# Altium PCB dc_power_backup_module_v1.PcbDoc (part 3 of 4)
Units mil, origin at the board's own origin, x right, y up, seen from the top; angles counter-clockwise.
Board outline 3300 x 2890 mil, 2 copper layers (Top Layer, Bottom Layer); 44 components, 21 nets, 171 pads, 32 vias.
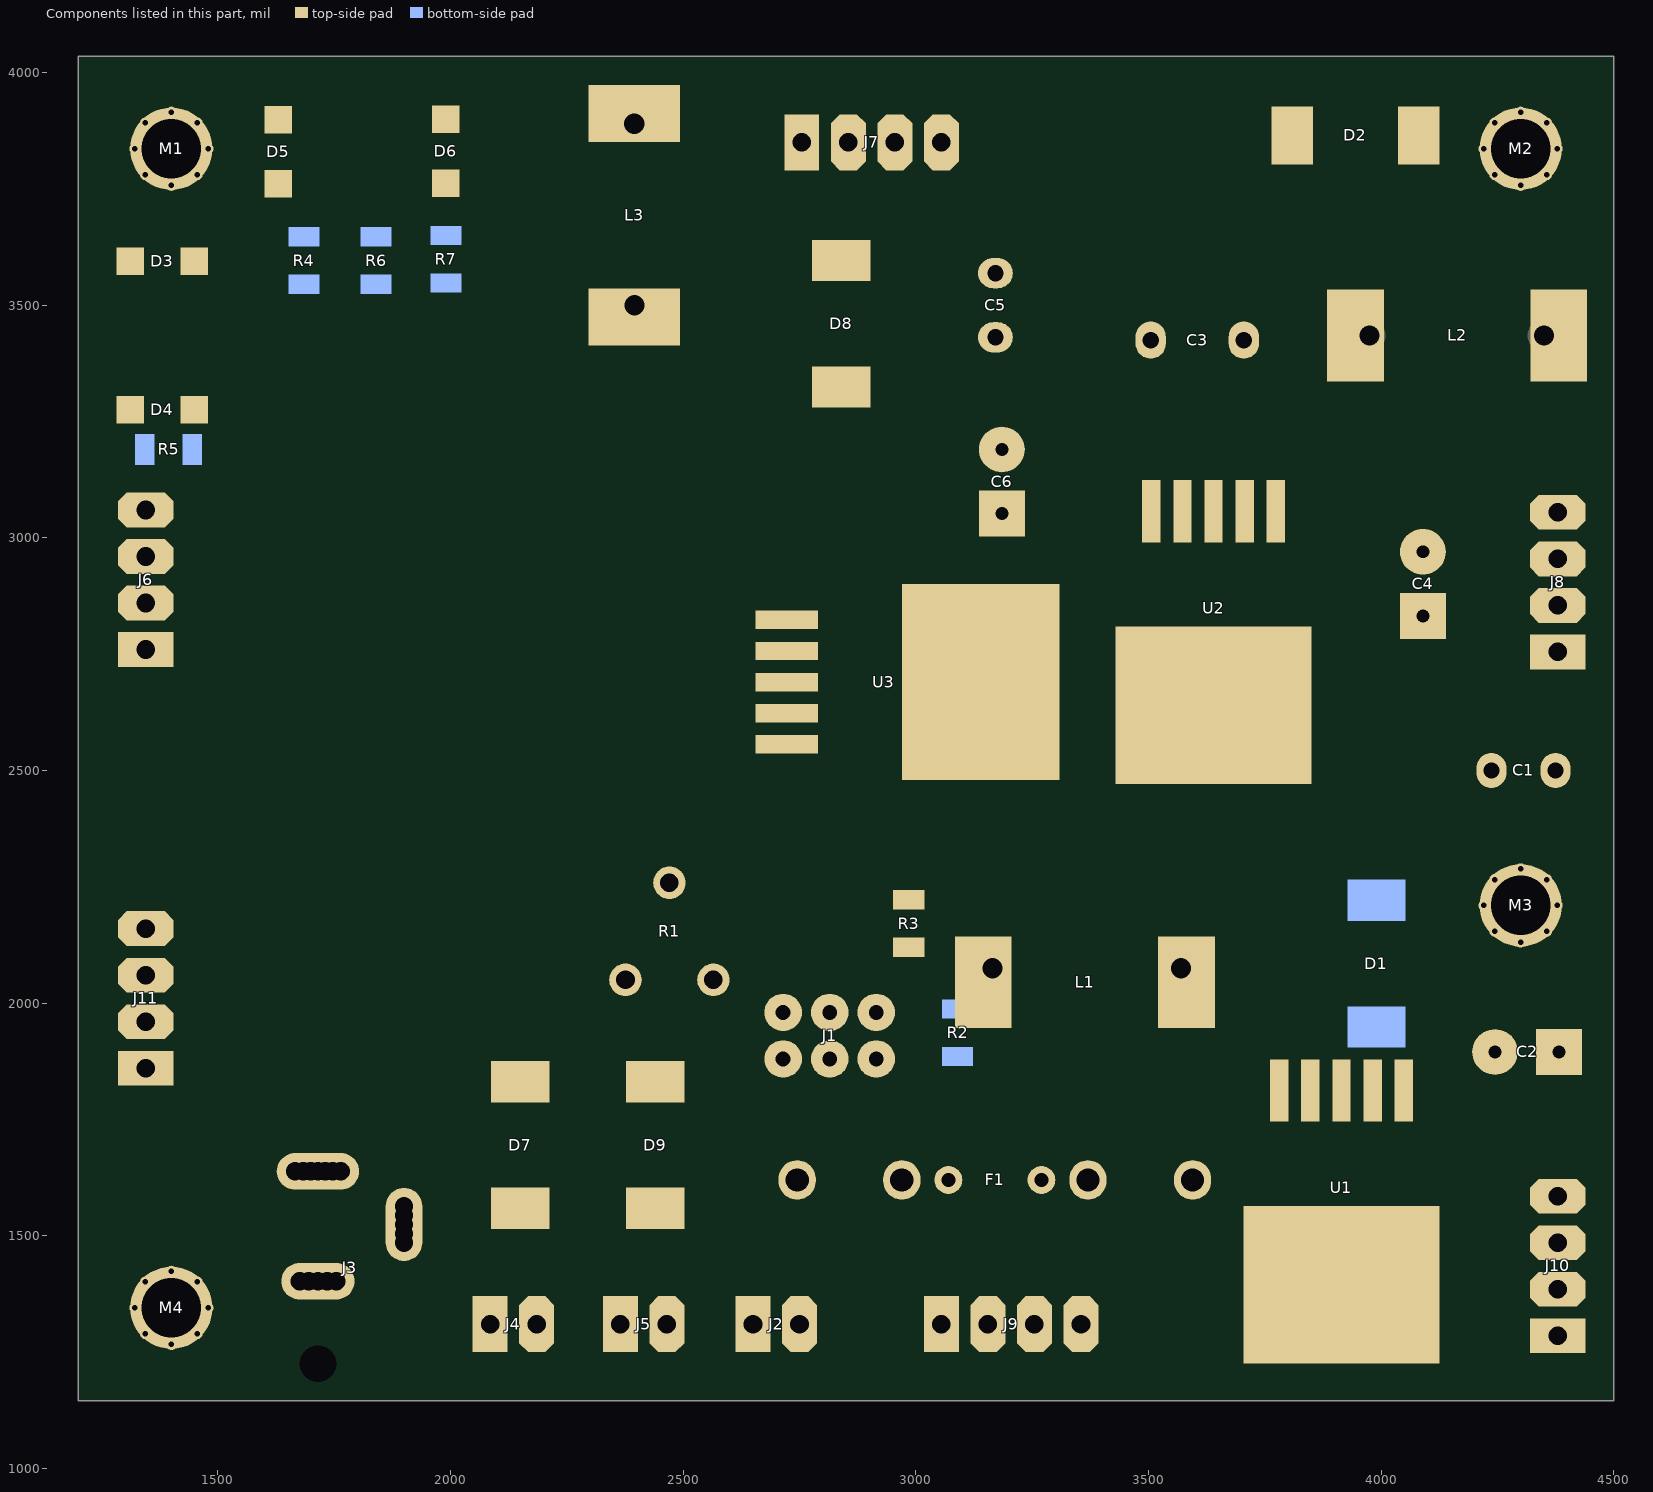
[diagram p3: the components of this part, seen from the top]

## Via types
v1: diameter 50, hole 28, Top Layer to Bottom Layer, 32 vias

## Nets (pads, with @x,y where several pads share a name; then routed paths per layer and width w, separated by ;. In a path a pad name is that pad's centre, name@x,y a point inside that pad or via, vN(x,y) a via of type N, cw(c..) or ccw(c..) an arc to the next point about the centre after c; other vN are vias at no path point) (continued)
copper on no net: (continued)
  Top Layer w0.3: 2058.5,2349.8 2062.1,2349.8 ; 2058.5,2357.6 2062.1,2357.6 ; 2058.5,2370.5 2062.4,2370.5 ; 2058.5,2378.3 2062.1,2378.3 ; 2058.5,2599.1 2063.3,2599.1 ; 2058.8,2339.3 2061.8,2339.3 ; 2058.8,2347.4 2061.8,2347.4 ; 2058.8,2360 2061.8,2360 ; 2058.8,2368.1 2061.8,2368.1 ; 2058.8,2491.4 2106.8,2491.4 ; 2058.8,2599.4 2063.6,2599.4 ; 2058.8,2599.7 2063.6,2599.7 ; 2059.1,2337.2 2061.5,2337.2 ; 2059.1,2370.2 2061.5,2370.2 ; 2059.1,2462.6 2131.7,2462.6 ; 2059.1,2600 2063.9,2600 ; 2059.4,2349.5 2061.2,2349.5 ; 2059.4,2357.9 2061.2,2357.9 ; 2059.4,2378.6 2061.2,2378.6 ; 2059.4,2600.3 2064.2,2600.3 ; 2059.7,2600.6 2064.5,2600.6 ; 2060,2320.7 2064.2,2320.7 ; 2060,2491.7 2107.4,2491.7 ; 2060,2600.9 2064.8,2600.9 ; 2060,2601.2 2065.1,2601.2 ; 2060.3,2601.5 2065.4,2601.5 ; 2060.6,2601.8 2065.7,2601.8 ; 2060.9,2602.1 2066,2602.1 ; 2061.2,2320.4 2064.2,2320.4 ; 2061.2,2492 2108.3,2492 ; 2061.2,2602.4 2066.3,2602.4 ; 2061.2,2602.7 2066.6,2602.7 ; 2061.5,2309 2063,2309 ; 2061.5,2320.1 2064.2,2320.1 ; 2061.5,2603 2066.9,2603 ; 2061.8,2603.3 2067.2,2603.3 ; 2062.1,2309.3 2063.3,2309.3 ; 2062.1,2319.8 2064.2,2319.8 ; 2062.1,2492.3 2108.9,2492.3 ; 2062.1,2603.6 2067.5,2603.6 ; 2062.4,2309.6 2063.6,2309.6 ; 2062.4,2319.5 2064.2,2319.5 ; 2062.4,2462.9 2133.2,2462.9 ; 2062.4,2603.9 2067.8,2603.9 ; 2062.7,2309.9 2063.9,2309.9 ; 2062.7,2318.9 2064.2,2318.9 ; 2062.7,2319.2 2064.2,2319.2 ; 2062.7,2604.2 2068.1,2604.2 ; 2062.7,2604.5 2068.4,2604.5 ; 2063,2310.2 2064.2,2310.2 ; 2063,2318.6 2064.2,2318.6 ; 2063,2321 2064.2,2321 ; 2063,2604.8 2068.7,2604.8 ; 2063.3,2310.5 2064.5,2310.5 ; 2063.3,2318 2064.2,2318 ; 2063.3,2318.3 2064.2,2318.3 ; 2063.3,2321.3 2064.2,2321.3 ; 2063.3,2321.6 2063.9,2321.6 ; 2063.3,2492.6 2109.5,2492.6 ; 2063.3,2605.1 2069,2605.1 ; 2063.6,2310.8 2064.5,2310.8 ; 2063.6,2317.1 2064.2,2317.1 ; 2063.6,2317.4 2064.2,2317.4 ; 2063.6,2317.7 2064.2,2317.7 ; 2063.6,2605.4 2069.3,2605.4 ; 2063.9,2311.1 2064.5,2311.1 ; 2063.9,2311.4 2064.2,2311.4 ; 2063.9,2605.7 2069.6,2605.7 ; 2064.2,2492.9 2110.1,2492.9 ; 2064.2,2606 2069.9,2606 ; 2064.5,2606.3 2070.2,2606.3 ; 2064.5,2606.6 2070.5,2606.6 ; 2064.8,2606.9 2070.8,2606.9 ; 2065.1,2493.2 2110.7,2493.2 ; 2065.1,2607.2 2071.1,2607.2 ; 2065.4,2463.2 2134.7,2463.2 ; 2065.4,2607.5 2071.4,2607.5 ; 2065.7,2607.8 2071.7,2607.8 ; 2066,2608.1 2072.3,2608.1 ; 2066.3,2352.8 2074.7,2352.8 ; 2066.3,2353.1 2075,2353.1 ; 2066.3,2353.4 2075,2353.4 ; 2066.3,2353.7 2075,2353.7 ; 2066.3,2354 2075,2354 ; 2066.3,2354.3 2075,2354.3 ; 2066.3,2354.6 2074.7,2354.6 ; 2066.3,2373.5 2074.7,2373.5 ; 2066.3,2373.8 2075,2373.8 ; 2066.3,2374.1 2075,2374.1 ; 2066.3,2374.4 2075,2374.4 ; 2066.3,2374.7 2075,2374.7 ; 2066.3,2375 2075,2375 ; 2066.3,2375.3 2074.7,2375.3 ; 2066.3,2493.5 2111.3,2493.5 ; 2066.3,2608.4 2072.6,2608.4 ; 2066.6,2351.9 2074.7,2351.9 ; 2066.6,2352.2 2074.7,2352.2 ; 2066.6,2352.5 2074.7,2352.5 ; 2066.6,2354.9 2074.7,2354.9 ; 2066.6,2355.2 2074.7,2355.2 ; 2066.6,2355.5 2074.7,2355.5 ; 2066.6,2372.6 2074.7,2372.6 ; 2066.6,2372.9 2074.7,2372.9 ; 2066.6,2373.2 2074.7,2373.2 ; 2066.6,2375.6 2074.7,2375.6 ; 2066.6,2375.9 2074.7,2375.9 ; 2066.6,2376.2 2074.7,2376.2 ; 2066.6,2608.7 2072.9,2608.7 ; 2066.9,2351.3 2074.1,2351.3 ; 2066.9,2351.6 2074.4,2351.6 ; 2066.9,2355.8 2074.4,2355.8 ; 2066.9,2356.1 2074.1,2356.1 ; 2066.9,2372 2074.4,2372 ; 2066.9,2372.3 2074.4,2372.3 ; 2066.9,2376.5 2074.4,2376.5 ; 2066.9,2376.8 2074.1,2376.8 ; 2066.9,2609 2073.2,2609 ; 2066.9,2609.3 2073.5,2609.3 ; 2067.2,2351 2074.1,2351 ; 2067.2,2356.4 2074.1,2356.4 ; 2067.2,2371.7 2074.1,2371.7 ; 2067.2,2377.1 2074.1,2377.1 ; 2067.2,2493.8 2111.9,2493.8 ; 2067.2,2609.6 2073.8,2609.6 ; 2067.5,2350.7 2073.8,2350.7 ; 2067.5,2356.7 2073.8,2356.7 ; 2067.5,2371.4 2073.8,2371.4 ; 2067.5,2377.4 2073.8,2377.4 ; 2067.5,2609.9 2074.1,2609.9 ; 2067.8,2350.4 2073.5,2350.4 ; 2067.8,2357 2073.5,2357 ; 2067.8,2371.1 2073.5,2371.1 ; 2067.8,2377.7 2073.5,2377.7 ; 2067.8,2610.2 2074.7,2610.2 ; 2068.1,2350.1 2073.2,2350.1 ; 2068.1,2357.3 2073.2,2357.3 ; 2068.1,2370.8 2073.2,2370.8 ; 2068.1,2378 2072.9,2378 ; 2068.1,2463.5 2135.9,2463.5 ; 2068.1,2494.1 2112.5,2494.1 ; 2068.1,2610.5 2075,2610.5 ; 2068.4,2610.8 2075.3,2610.8 ; 2068.7,2349.8 2072.6,2349.8 ; 2068.7,2357.6 2072.6,2357.6 ; 2068.7,2370.5 2072.6,2370.5 ; 2068.7,2378.3 2072.6,2378.3 ; 2068.7,2611.1 2075.6,2611.1 ; 2069,2494.4 2113.1,2494.4 ; 2069,2611.4 2075.9,2611.4 ; 2069.3,2611.7 2076.5,2611.7 ; 2069.6,2349.5 2071.7,2349.5 ; 2069.6,2357.9 2071.7,2357.9 ; 2069.6,2370.2 2071.7,2370.2 ; 2069.6,2378.6 2071.4,2378.6 ; 2069.6,2612 2076.8,2612 ; 2069.9,2494.7 2113.4,2494.7 ; 2069.9,2612.3 2077.1,2612.3 ; 2070.2,2612.6 2077.4,2612.6 ; 2070.5,2463.8 2137.4,2463.8 ; 2070.5,2612.9 2078,2612.9 ; 2070.8,2495 2114,2495 ; 2070.8,2613.2 2078.3,2613.2 ; 2071.1,2613.5 2078.6,2613.5 ; 2071.4,2613.8 2078.9,2613.8 ; 2071.7,2495.3 2114.6,2495.3 ; 2071.7,2614.1 2079.5,2614.1 ; 2072,2614.4 2079.8,2614.4 ; 2072.3,2614.7 2080.1,2614.7 ; 2072.6,2495.6 2115.2,2495.6 ; 2072.6,2615 2080.7,2615 ; 2072.9,2464.1 2138.6,2464.1 ; 2072.9,2615.3 2081,2615.3 ; 2073.2,2615.6 2081.3,2615.6 ; 2073.5,2495.9 2115.5,2495.9 ; 2073.5,2615.9 2081.9,2615.9 ; 2073.8,2318.3 2074.4,2318.3 ; 2073.8,2318.6 2074.4,2318.6 ; 2073.8,2318.9 2074.4,2318.9 ; 2073.8,2319.2 2074.7,2319.2 ; 2073.8,2319.5 2074.7,2319.5 ; 2073.8,2319.8 2075,2319.8 ; 2073.8,2320.1 2075.6,2320.1 ; 2073.8,2320.4 2084.9,2320.4 ; 2073.8,2320.7 2084.9,2320.7 ; 2073.8,2321 2084.9,2321 ; 2073.8,2321.3 2084.9,2321.3 ; 2073.8,2616.2 2082.2,2616.2 ; 2074.1,2496.2 2116.1,2496.2 ; 2074.1,2616.5 2082.5,2616.5 ; 2074.4,2616.8 2083.1,2616.8 ; 2074.7,2617.1 2083.4,2617.1 ; 2075,2496.5 2116.7,2496.5 ; 2075,2617.4 2084,2617.4 ; 2075.3,2464.4 2139.8,2464.4 ; 2075.3,2617.7 2084.3,2617.7 ; 2075.6,2618 2084.9,2618 ; 2075.9,2496.8 2117,2496.8 ; 2076.2,2618.3 2085.2,2618.3 ; 2076.5,2353.4 2085.2,2353.4 ; 2076.5,2353.7 2085.2,2353.7 ; 2076.5,2354 2085.2,2354 ; 2076.5,2373.8 2085.2,2373.8 ; 2076.5,2374.1 2085.2,2374.1 ; 2076.5,2374.4 2085.2,2374.4 ; 2076.5,2374.7 2085.2,2374.7 ; 2076.5,2497.1 2117.6,2497.1 ; 2076.5,2618.6 2085.5,2618.6 ; 2076.8,2352.2 2084.9,2352.2 ; 2076.8,2352.5 2084.9,2352.5 ; 2076.8,2352.8 2085.2,2352.8 ; 2076.8,2353.1 2085.2,2353.1 ; 2076.8,2354.3 2085.2,2354.3 ; 2076.8,2354.6 2085.2,2354.6 ; 2076.8,2354.9 2084.9,2354.9 ; 2076.8,2355.2 2084.9,2355.2 ; 2076.8,2372.9 2084.9,2372.9 ; 2076.8,2373.2 2084.9,2373.2 ; 2076.8,2373.5 2085.2,2373.5 ; 2076.8,2375 2085.2,2375 ; 2076.8,2375.3 2085.2,2375.3 ; 2076.8,2375.6 2084.9,2375.6 ; 2076.8,2375.9 2084.9,2375.9 ; 2076.8,2618.9 2086.1,2618.9 ; 2077.1,2351.6 2084.6,2351.6 ; 2077.1,2351.9 2084.9,2351.9 ; 2077.1,2355.5 2084.9,2355.5 ; 2077.1,2355.8 2084.6,2355.8 ; 2077.1,2372.3 2084.6,2372.3 ; 2077.1,2372.6 2084.9,2372.6 ; 2077.1,2376.2 2084.9,2376.2 ; 2077.1,2376.5 2084.6,2376.5 ; 2077.1,2619.2 2086.4,2619.2 ; 2077.4,2351 2084.3,2351 ; 2077.4,2351.3 2084.6,2351.3 ; 2077.4,2356.1 2084.6,2356.1 ; 2077.4,2356.4 2084.3,2356.4 ; 2077.4,2371.7 2084.3,2371.7 ; 2077.4,2372 2084.6,2372 ; 2077.4,2376.8 2084.6,2376.8 ; 2077.4,2377.1 2084.3,2377.1 ; 2077.4,2464.7 2141,2464.7 ; 2077.4,2497.4 2118.2,2497.4 ; 2077.4,2619.5 2087,2619.5 ; 2077.7,2350.7 2084,2350.7 ; 2077.7,2356.7 2084,2356.7 ; 2077.7,2371.4 2084,2371.4 ; 2077.7,2377.4 2084,2377.4 ; 2077.7,2619.8 2087.3,2619.8 ; 2078,2309 2080.4,2309 ; 2078,2309.3 2080.4,2309.3 ; 2078,2309.6 2080.4,2309.6 ; 2078,2350.4 2083.7,2350.4 ; 2078,2357 2083.7,2357 ; 2078,2371.1 2083.7,2371.1 ; 2078,2377.7 2083.7,2377.7 ; 2078,2497.7 2118.5,2497.7 ; 2078,2620.1 2087.9,2620.1 ; 2078.3,2309.9 2080.4,2309.9 ; 2078.3,2310.2 2080.4,2310.2 ; 2078.3,2310.5 2080.4,2310.5 ; 2078.3,2310.8 2080.4,2310.8 ; 2078.3,2311.1 2080.4,2311.1 ; 2078.3,2311.4 2080.4,2311.4 ; 2078.3,2311.7 2080.4,2311.7 ; 2078.3,2312 2080.4,2312 ; 2078.3,2312.3 2080.4,2312.3 ; 2078.3,2312.6 2080.4,2312.6 ; 2078.3,2312.9 2080.4,2312.9 ; 2078.3,2313.2 2080.4,2313.2 ; 2078.3,2313.5 2080.4,2313.5 ; 2078.3,2313.8 2080.4,2313.8 ; 2078.3,2314.1 2080.4,2314.1 ; 2078.3,2314.4 2080.4,2314.4 ; 2078.3,2314.7 2080.4,2314.7 ; 2078.3,2315 2080.4,2315 ; 2078.3,2315.3 2080.4,2315.3 ; 2078.3,2315.6 2080.4,2315.6 ; 2078.3,2315.9 2080.4,2315.9 ; 2078.3,2316.2 2080.4,2316.2 ; 2078.3,2316.5 2080.4,2316.5 ; 2078.3,2316.8 2080.4,2316.8 ; 2078.3,2317.1 2080.4,2317.1 ; 2078.3,2317.4 2080.4,2317.4 ; 2078.3,2317.7 2080.4,2317.7 ; 2078.3,2318 2080.4,2318 ; 2078.3,2318.3 2080.4,2318.3 ; 2078.3,2318.6 2080.4,2318.6 ; 2078.3,2318.9 2080.4,2318.9 ; 2078.3,2319.2 2080.4,2319.2 ; 2078.3,2319.5 2080.4,2319.5 ; 2078.3,2319.8 2080.4,2319.8 ; 2078.3,2320.1 2080.4,2320.1 ; 2078.3,2370.8 2083.4,2370.8 ; 2078.3,2620.4 2088.5,2620.4 ; 2078.6,2350.1 2083.4,2350.1 ; 2078.6,2357.3 2083.4,2357.3 ; 2078.6,2378 2083.4,2378 ; 2078.9,2349.8 2082.8,2349.8 ; 2078.9,2357.6 2082.8,2357.6 ; 2078.9,2370.5 2082.8,2370.5 ; 2078.9,2378.3 2082.8,2378.3 ; 2078.9,2498 2119.1,2498 ; 2078.9,2620.7 2088.8,2620.7 ; 2079.2,2465 2142.2,2465 ; 2079.2,2621 2089.4,2621 ; 2079.5,2498.3 2119.4,2498.3 ; 2079.5,2537.3 2084.6,2537.3 ; 2079.5,2621.3 2089.7,2621.3 ; 2079.8,2349.5 2081.9,2349.5 ; 2079.8,2357.9 2081.9,2357.9 ; 2079.8,2370.2 2081.9,2370.2 ; 2079.8,2537 2087.6,2537 ; 2079.8,2621.6 2090.3,2621.6 ; 2080.1,2378.6 2081.9,2378.6 ; 2080.1,2498.6 2119.7,2498.6 ; 2080.1,2621.9 2090.9,2621.9 ; 2080.4,2536.7 2089.7,2536.7 ; 2080.4,2622.2 2091.2,2622.2 ; 2081,2498.9 2120.3,2498.9 ; 2081,2536.4 2091.5,2536.4 ; 2081,2622.5 2091.8,2622.5 ; 2081.3,2465.3 2143.4,2465.3 ; 2081.3,2622.8 2092.4,2622.8 ; 2081.6,2499.2 2120.6,2499.2 ; 2081.6,2623.1 2092.7,2623.1 ; 2081.9,2536.1 2093.3,2536.1 ; 2081.9,2623.4 2093.3,2623.4 ; 2082.2,2499.5 2120.9,2499.5 ; 2082.5,2535.8 2094.8,2535.8 ; 2082.5,2623.7 2093.9,2623.7 ; 2082.8,2499.8 2121.5,2499.8 ; 2082.8,2624 2094.5,2624 ; 2083.1,2320.1 2084.9,2320.1 ; 2083.1,2465.6 2144.6,2465.6 ; 2083.1,2535.5 2096.3,2535.5 ; 2083.1,2624.3 2094.8,2624.3 ; 2083.4,2319.8 2084.9,2319.8 ; 2083.4,2500.1 2121.8,2500.1 ; 2083.4,2624.6 2095.4,2624.6 ; 2083.7,2319.5 2084.9,2319.5 ; 2084,2318.9 2084.9,2318.9 ; 2084,2319.2 2084.9,2319.2 ; 2084,2500.4 2122.1,2500.4 ; 2084,2535.2 2097.5,2535.2 ; 2084,2624.9 2096,2624.9 ; 2084.3,2318.3 2084.9,2318.3 ; 2084.3,2318.6 2084.9,2318.6 ; 2084.3,2625.2 2096.6,2625.2 ; 2084.6,2500.7 2122.7,2500.7 ; 2084.6,2534.9 2099,2534.9 ; 2084.6,2625.5 2097.2,2625.5 ; 2084.9,2465.9 2145.8,2465.9 ; 2085.2,2501 2123,2501 ; 2085.2,2534.6 2100.2,2534.6 ; 2085.2,2625.8 2097.8,2625.8 ; 2085.5,2626.1 2098.4,2626.1 ; 2085.8,2501.3 2123.3,2501.3 ; 2085.8,2534.3 2101.1,2534.3 ; 2085.8,2626.4 2099,2626.4 ; 2086.1,2626.7 2099.6,2626.7 ; 2086.4,2501.6 2123.6,2501.6 ; 2086.4,2534 2102.3,2534 ; 2086.7,2466.2 2147,2466.2 ; 2086.7,2627 2100.2,2627 ; 2087,2349.5 2108.6,2349.5 ; 2087,2349.8 2108.3,2349.8 ; 2087,2350.1 2108,2350.1 ; 2087,2350.4 2107.7,2350.4 ; 2087,2350.7 2107.4,2350.7 ; 2087,2351 2107.1,2351 ; 2087,2351.3 2106.8,2351.3 ; 2087,2351.6 2106.2,2351.6 ; 2087,2351.9 2105.9,2351.9 ; 2087,2352.2 2105.6,2352.2 ; 2087,2352.5 2105,2352.5 ; 2087,2352.8 2105.3,2352.8 ; 2087,2353.1 2105.9,2353.1 ; 2087,2353.4 2106.8,2353.4 ; 2087,2353.7 2107.4,2353.7 ; 2087,2354 2108,2354 ; 2087,2354.3 2108.6,2354.3 ; 2087,2354.6 2108.9,2354.6 ; 2087,2354.9 2109.5,2354.9 ; 2087,2355.2 2110.1,2355.2 ; 2087,2355.5 2110.4,2355.5 ; 2087,2355.8 2110.7,2355.8 ; 2087,2356.1 2111.3,2356.1 ; 2087,2356.4 2111.6,2356.4 ; 2087,2356.7 2111.9,2356.7 ; 2087,2357 2112.5,2357 ; 2087,2357.3 2112.8,2357.3 ; 2087,2357.6 2113.1,2357.6 ; 2087,2357.9 2113.4,2357.9 ; 2087,2370.2 2113.1,2370.2 ; 2087,2370.5 2112.8,2370.5 ; 2087,2370.8 2112.5,2370.8 ; 2087,2371.1 2112.2,2371.1 ; 2087,2371.4 2111.9,2371.4 ; 2087,2371.7 2111.6,2371.7 ; 2087,2372 2111,2372 ; 2087,2372.3 2110.7,2372.3 ; 2087,2372.6 2110.4,2372.6 ; 2087,2372.9 2109.8,2372.9 ; 2087,2373.2 2109.2,2373.2 ; 2087,2373.5 2108.9,2373.5 ; 2087,2373.8 2108.3,2373.8 ; 2087,2374.1 2107.7,2374.1 ; 2087,2374.4 2107.1,2374.4 ; 2087,2374.7 2106.5,2374.7 ; 2087,2375 2105.9,2375 ; 2087,2375.3 2105,2375.3 ; 2087,2375.6 2104.4,2375.6 ; 2087,2375.9 2103.5,2375.9 ; 2087,2376.2 2102.6,2376.2 ; 2087,2376.5 2101.7,2376.5 ; 2087,2376.8 2100.5,2376.8 ; 2087,2377.1 2099.3,2377.1 ; 2087,2377.4 2098.1,2377.4 ; 2087,2377.7 2096.6,2377.7 ; 2087,2378 2094.8,2378 ; 2087,2378.3 2092.7,2378.3 ; 2087,2378.6 2088.8,2378.6 ; 2087,2501.9 2123.9,2501.9 ; 2087,2627.3 2100.8,2627.3 ; 2087.3,2533.7 2103.5,2533.7 ; 2087.6,2502.2 2124.2,2502.2 ; 2087.6,2627.6 2101.4,2627.6 ; 2087.9,2533.4 2104.4,2533.4 ; 2087.9,2627.9 2102,2627.9 ; 2088.2,2466.5 2147.9,2466.5 ; 2088.2,2502.5 2124.5,2502.5 ; 2088.2,2628.2 2102.6,2628.2 ; 2088.5,2502.8 2124.8,2502.8 ; 2088.5,2533.1 2105.6,2533.1 ; 2088.8,2628.5 2103.2,2628.5 ; 2089.1,2503.1 2125.1,2503.1 ; 2089.1,2532.8 2106.5,2532.8 ; 2089.1,2628.8 2103.8,2628.8 ; 2089.4,2349.2 2108.9,2349.2 ; 2089.7,2503.4 2125.4,2503.4 ; 2089.7,2532.5 2107.4,2532.5 ; 2089.7,2629.1 2104.7,2629.1 ; 2090,2466.8 2149.1,2466.8 ; 2090,2503.7 2125.7,2503.7 ; 2090,2629.4 2105.3,2629.4 ; 2090.3,2532.2 2108.3,2532.2 ; 2090.3,2629.7 2105.9,2629.7 ; 2090.6,2504 2126,2504 ; 2090.9,2531.9 2109.2,2531.9 ; 2090.9,2630 2106.5,2630 ; 2091.2,2369.9 2113.4,2369.9 ; 2091.2,2504.3 2126.3,2504.3 ; 2091.2,2630.3 2107.4,2630.3 ; 2091.5,2348.9 2109.2,2348.9 ; 2091.5,2358.2 2113.7,2358.2 ; 2091.5,2467.1 2150,2467.1 ; 2091.5,2504.6 2126.6,2504.6 ; 2091.5,2531.6 2110.1,2531.6 ; 2091.8,2630.6 2108,2630.6 ; 2092.1,2504.9 2126.9,2504.9 ; 2092.1,2531.3 2111,2531.3 ; 2092.1,2630.9 2108.9,2630.9 ; 2092.4,2505.2 2127.2,2505.2 ; 2092.7,2348.6 2109.5,2348.6 ; 2092.7,2531 2111.9,2531 ; 2092.7,2631.2 2109.5,2631.2 ; 2093,2467.4 2150.9,2467.4 ; 2093,2505.5 2127.5,2505.5 ; 2093.3,2505.8 2127.8,2505.8 ; 2093.3,2530.7 2112.5,2530.7 ; 2093.3,2631.5 2110.4,2631.5 ; 2093.6,2321 2102,2321 ; 2093.6,2321.3 2100.8,2321.3 ; 2093.6,2631.8 2111,2631.8 ; 2093.9,2348.3 2109.8,2348.3 ; 2093.9,2506.1 2127.8,2506.1 ; 2093.9,2530.4 2113.4,2530.4 ; 2094.2,2369.6 2113.7,2369.6 ; 2094.2,2506.4 2128.1,2506.4 ; 2094.2,2530.1 2114,2530.1 ; 2094.2,2632.1 2111.9,2632.1 ; 2094.5,2320.7 2102.6,2320.7 ; 2094.5,2467.7 2152.1,2467.7 ; 2094.5,2506.7 2128.4,2506.7 ; 2094.5,2632.4 2112.5,2632.4 ; 2094.8,2348 2110.1,2348 ; 2094.8,2358.5 2113.7,2358.5 ; 2094.8,2529.8 2114.9,2529.8 ; 2095.1,2309 2097.8,2309 ; 2095.1,2320.4 2102.9,2320.4 ; 2095.1,2507 2128.7,2507 ; 2095.1,2632.7 2113.4,2632.7 ; 2095.4,2309.3 2097.8,2309.3 ; 2095.4,2309.6 2097.5,2309.6 ; 2095.4,2309.9 2097.5,2309.9 ; 2095.4,2310.2 2097.5,2310.2 ; 2095.4,2310.5 2097.5,2310.5 ; 2095.4,2310.8 2097.5,2310.8 ; 2095.4,2311.1 2097.5,2311.1 ; 2095.4,2311.4 2097.5,2311.4 ; 2095.4,2311.7 2097.5,2311.7 ; 2095.4,2312 2097.5,2312 ; 2095.4,2312.3 2097.5,2312.3 ; 2095.4,2312.6 2097.5,2312.6 ; 2095.4,2312.9 2097.5,2312.9 ; 2095.4,2313.2 2097.5,2313.2 ; 2095.4,2313.5 2097.5,2313.5 ; 2095.4,2313.8 2097.5,2313.8 ; 2095.4,2314.1 2101.1,2314.1 ; 2095.4,2314.4 2101.4,2314.4 ; 2095.4,2314.7 2102,2314.7 ; 2095.4,2315 2097.5,2315 ; 2095.4,2315.3 2097.5,2315.3 ; 2095.4,2315.6 2097.5,2315.6 ; 2095.4,2315.9 2097.5,2315.9 ; 2095.4,2316.2 2097.5,2316.2 ; 2095.4,2316.5 2097.5,2316.5 ; 2095.4,2316.8 2097.5,2316.8 ; 2095.4,2317.1 2097.5,2317.1 ; 2095.4,2317.4 2097.5,2317.4 ; 2095.4,2317.7 2097.5,2317.7 ; 2095.4,2318 2097.5,2318 ; 2095.4,2318.3 2097.5,2318.3 ; 2095.4,2318.6 2097.5,2318.6 ; 2095.4,2318.9 2097.5,2318.9 ; 2095.4,2319.2 2097.5,2319.2 ; 2095.4,2319.5 2097.5,2319.5 ; 2095.4,2319.8 2097.5,2319.8 ; 2095.4,2320.1 2097.5,2320.1 ; 2095.4,2347.7 2110.4,2347.7 ; 2095.4,2507.3 2128.7,2507.3 ; 2095.4,2529.5 2115.5,2529.5 ; 2095.4,2633 2114.3,2633 ; 2095.7,2507.6 2129,2507.6 ; 2095.7,2529.2 2116.4,2529.2 ; 2096,2468 2153,2468 ; 2096,2507.9 2129.3,2507.9 ; 2096,2633.3 2115.2,2633.3 ; 2096.3,2347.4 2110.7,2347.4 ; 2096.3,2369.3 2114,2369.3 ; 2096.3,2528.9 2117,2528.9 ; 2096.6,2508.2 2129.3,2508.2 ; 2096.6,2528.6 2117.6,2528.6 ; 2096.6,2633.6 2116.1,2633.6 ; 2096.9,2347.1 2111,2347.1 ; 2096.9,2358.8 2114,2358.8 ; 2096.9,2508.5 2129.6,2508.5 ; 2096.9,2633.9 2117,2633.9 ; 2097.2,2468.3 2153.9,2468.3 ; 2097.2,2508.8 2129.6,2508.8 ; 2097.2,2528.3 2118.2,2528.3 ; 2097.5,2346.8 2111,2346.8 ; 2097.5,2509.1 2129.9,2509.1 ; 2097.5,2528 2118.8,2528 ; 2097.5,2634.2 2117.9,2634.2 ; 2097.8,2509.4 2129.9,2509.4 ; 2097.8,2527.7 2119.4,2527.7 ; 2098.1,2346.5 2111.3,2346.5 ; 2098.1,2369 2114.3,2369 ; 2098.1,2509.7 2130.2,2509.7 ; 2098.1,2634.5 2118.8,2634.5 ; 2098.4,2359.1 2114.3,2359.1 ; 2098.4,2510 2130.2,2510 ; 2098.4,2527.4 2120,2527.4 ; 2098.7,2313.8 2101.4,2313.8 ; 2098.7,2315 2102.6,2315 ; 2098.7,2346.2 2111.6,2346.2 ; 2098.7,2468.6 2154.8,2468.6 ; 2098.7,2510.3 2130.2,2510.3 ; 2098.7,2527.1 2120.6,2527.1 ; 2098.7,2634.8 2119.7,2634.8 ; 2099,2313.5 2101.7,2313.5 ; 2099,2345.9 2111.9,2345.9 ; 2099,2510.6 2130.5,2510.6 ; 2099,2526.8 2121.2,2526.8 ; 2099,2635.1 2120.9,2635.1 ; 2099.3,2313.2 2101.7,2313.2 ; 2099.3,2368.7 2114.3,2368.7 ; 2099.3,2510.9 2130.5,2510.9 ; 2099.3,2526.5 2121.8,2526.5 ; 2099.6,2312.6 2102.3,2312.6 ; 2099.6,2312.9 2102,2312.9 ; 2099.6,2345.6 2111.9,2345.6 ; 2099.6,2511.2 2130.5,2511.2 ; 2099.6,2526.2 2122.1,2526.2 ; 2099.6,2635.4 2121.8,2635.4 ; 2099.9,2312.3 2102.6,2312.3 ; 2099.9,2315.3 2103.2,2315.3 ; 2099.9,2359.4 2114.6,2359.4 ; 2099.9,2468.9 2155.7,2468.9 ; 2099.9,2511.5 2130.8,2511.5 ; 2099.9,2525.9 2122.7,2525.9 ; 2100.2,2311.7 2102.9,2311.7 ; 2100.2,2312 2102.6,2312 ; 2100.2,2320.1 2103.2,2320.1 ; 2100.2,2345.3 2112.2,2345.3 ; 2100.2,2511.8 2130.8,2511.8 ; 2100.2,2525.6 2123,2525.6 ; 2100.2,2635.7 2123,2635.7 ; 2100.5,2311.4 2103.2,2311.4 ; 2100.5,2315.6 2103.2,2315.6 ; 2100.5,2319.8 2103.5,2319.8 ; 2100.5,2345 2112.5,2345 ; 2100.5,2368.4 2114.6,2368.4 ; 2100.5,2512.1 2130.8,2512.1 ; 2100.5,2525.3 2123.6,2525.3 ; 2100.8,2311.1 2103.2,2311.1 ; 2100.8,2315.9 2103.5,2315.9 ; 2100.8,2344.7 2112.5,2344.7 ; 2100.8,2359.7 2114.6,2359.7 ; 2100.8,2512.4 2130.8,2512.4 ; 2100.8,2525 2123.9,2525 ; 2100.8,2636 2123.9,2636 ; 2101.1,2310.5 2103.8,2310.5 ; 2101.1,2310.8 2103.5,2310.8 ; 2101.1,2316.2 2103.8,2316.2 ; 2101.1,2319.2 2103.8,2319.2 ; 2101.1,2319.5 2103.8,2319.5 ; 2101.1,2512.7 2130.8,2512.7 ; 2101.1,2513 2131.1,2513 ; 2101.1,2524.7 2124.5,2524.7 ; 2101.1,2636.3 2125.1,2636.3 ; 2101.4,2310.2 2104.1,2310.2 ; 2101.4,2316.5 2103.8,2316.5 ; 2101.4,2316.8 2104.1,2316.8 ; 2101.4,2317.1 2104.1,2317.1 ; 2101.4,2318.6 2104.1,2318.6 ; 2101.4,2318.9 2104.1,2318.9 ; 2101.4,2344.4 2112.8,2344.4 ; 2101.4,2469.2 2156.6,2469.2 ; 2101.4,2513.3 2131.1,2513.3 ; 2101.4,2524.4 2124.8,2524.4 ; 2101.7,2309.6 2104.4,2309.6 ; 2101.7,2309.9 2104.1,2309.9 ; 2101.7,2317.4 2104.1,2317.4 ; 2101.7,2317.7 2104.1,2317.7 ; 2101.7,2318 2104.1,2318 ; 2101.7,2318.3 2104.1,2318.3 ; 2101.7,2344.1 2113.1,2344.1 ; 2101.7,2368.1 2114.9,2368.1 ; 2101.7,2513.6 2131.1,2513.6 ; 2101.7,2513.9 2131.1,2513.9 ; 2101.7,2523.8 2125.7,2523.8 ; 2101.7,2524.1 2125.1,2524.1 ; 2101.7,2636.6 2126.3,2636.6 ; 2102,2309.3 2104.7,2309.3 ; 2102,2343.8 2113.1,2343.8 ; 2102,2360 2114.9,2360 ; 2102,2514.2 2131.1,2514.2 ; 2102,2523.5 2126,2523.5 ; 2102.3,2309 2105.3,2309 ; 2102.3,2343.5 2113.4,2343.5 ; 2102.3,2514.5 2131.1,2514.5 ; 2102.3,2514.8 2131.1,2514.8 ; 2102.3,2522.9 2126.6,2522.9 ; 2102.3,2523.2 2126.3,2523.2 ; 2102.3,2636.9 2127.8,2636.9 ; 2102.6,2343.2 2113.4,2343.2 ; 2102.6,2367.8 2114.9,2367.8 ; 2102.6,2469.5 2157.5,2469.5 ; 2102.6,2515.1 2130.8,2515.1 ; 2102.6,2515.4 2130.8,2515.4 ; 2102.6,2522.3 2127.2,2522.3 ; 2102.6,2522.6 2126.9,2522.6 ; 2102.9,2342.9 2113.7,2342.9 ; 2102.9,2360.3 2115.2,2360.3 ; 2102.9,2515.7 2130.8,2515.7 ; 2102.9,2516 2130.8,2516 ; 2102.9,2516.3 2130.8,2516.3 ; 2102.9,2521.7 2127.8,2521.7 ; 2102.9,2522 2127.5,2522 ; 2102.9,2637.2 2129,2637.2 ; 2103.2,2342.6 2113.7,2342.6 ; 2103.2,2367.5 2115.2,2367.5 ; 2103.2,2516.6 2130.5,2516.6 ; 2103.2,2516.9 2130.5,2516.9 ; 2103.2,2517.2 2130.5,2517.2 ; 2103.2,2520.8 2128.4,2520.8 ; 2103.2,2521.1 2128.1,2521.1 ; 2103.2,2521.4 2127.8,2521.4 ; 2103.5,2342.3 2114,2342.3 ; 2103.5,2360.6 2115.2,2360.6 ; 2103.5,2517.5 2130.2,2517.5 ; 2103.5,2517.8 2130.2,2517.8 ; 2103.5,2518.1 2130.2,2518.1 ; 2103.5,2518.4 2129.9,2518.4 ; 2103.5,2518.7 2129.9,2518.7 ; 2103.5,2519 2129.6,2519 ; 2103.5,2519.3 2129.3,2519.3 ; 2103.5,2519.6 2129.3,2519.6 ; 2103.5,2519.9 2129,2519.9 ; 2103.5,2520.2 2128.7,2520.2 ; 2103.5,2520.5 2128.7,2520.5 ; 2103.5,2637.5 2130.5,2637.5 ; 2103.8,2342 2114,2342 ; 2103.8,2469.8 2158.1,2469.8 ; 2104.1,2341.7 2114.3,2341.7 ; 2104.1,2367.2 2115.2,2367.2 ; 2104.1,2637.8 2132,2637.8 ; 2104.4,2341.4 2114.3,2341.4 ; 2104.4,2360.9 2115.2,2360.9 ; 2104.7,2340.8 2114.6,2340.8 ; 2104.7,2341.1 2114.6,2341.1 ; 2104.7,2361.2 2115.5,2361.2 ; 2104.7,2366.9 2115.5,2366.9 ; 2104.7,2638.1 2133.5,2638.1 ; 2105,2340.5 2114.6,2340.5 ; 2105,2470.1 2159,2470.1 ; 2105.3,2339.9 2114.9,2339.9 ; 2105.3,2340.2 2114.9,2340.2 ; 2105.3,2361.5 2115.5,2361.5 ; 2105.3,2366.6 2115.5,2366.6 ; 2105.3,2638.4 2135.3,2638.4 ; 2105.6,2339.3 2115.2,2339.3 ; 2105.6,2339.6 2114.9,2339.6 ; 2105.6,2366.3 2115.5,2366.3 ; 2105.9,2338.7 2115.2,2338.7 ; 2105.9,2339 2115.2,2339 ; 2105.9,2361.8 2115.8,2361.8 ; 2105.9,2638.7 2137.1,2638.7 ; 2106.2,2338.1 2115.5,2338.1 ; 2106.2,2338.4 2115.2,2338.4 ; 2106.2,2362.1 2115.8,2362.1 ; 2106.2,2366 2115.8,2366 ; 2106.2,2470.4 2159.9,2470.4 ; 2106.5,2337.5 2115.5,2337.5 ; 2106.5,2337.8 2115.5,2337.8 ; 2106.5,2362.4 2115.8,2362.4 ; 2106.5,2365.7 2115.8,2365.7 ; 2106.5,2639 2139.2,2639 ; 2106.8,2336.6 2115.8,2336.6 ; 2106.8,2336.9 2115.5,2336.9 ; 2106.8,2337.2 2115.5,2337.2 ; 2106.8,2362.7 2115.8,2362.7 ; 2106.8,2365.4 2115.8,2365.4 ; 2107.1,2335.1 2115.8,2335.1 ; 2107.1,2335.4 2115.8,2335.4 ; 2107.1,2335.7 2115.8,2335.7 ; 2107.1,2336 2115.8,2336 ; 2107.1,2336.3 2115.8,2336.3 ; 2107.1,2363 2115.8,2363 ; 2107.1,2363.3 2115.8,2363.3 ; 2107.1,2364.8 2115.8,2364.8 ; 2107.1,2365.1 2115.8,2365.1 ; 2107.1,2450.3 2132.6,2450.3 ; 2107.1,2639.3 2141.9,2639.3 ; 2107.4,2328.8 2115.8,2328.8 ; 2107.4,2329.1 2115.8,2329.1 ; 2107.4,2329.4 2115.8,2329.4 ; 2107.4,2329.7 2115.8,2329.7 ; 2107.4,2330 2115.8,2330 ; 2107.4,2330.3 2115.8,2330.3 ; 2107.4,2330.6 2115.8,2330.6 ; 2107.4,2330.9 2115.8,2330.9 ; 2107.4,2331.2 2115.8,2331.2 ; 2107.4,2331.5 2115.8,2331.5 ; 2107.4,2331.8 2115.8,2331.8 ; 2107.4,2332.1 2115.8,2332.1 ; 2107.4,2332.4 2115.8,2332.4 ; 2107.4,2332.7 2115.8,2332.7 ; 2107.4,2333 2115.8,2333 ; 2107.4,2333.3 2115.8,2333.3 ; 2107.4,2333.6 2115.8,2333.6 ; 2107.4,2333.9 2115.8,2333.9 ; 2107.4,2334.2 2115.8,2334.2 ; 2107.4,2334.5 2115.8,2334.5 ; 2107.4,2334.8 2115.8,2334.8 ; 2107.4,2363.6 2115.8,2363.6 ; 2107.4,2363.9 2115.8,2363.9 ; 2107.4,2364.2 2115.8,2364.2 ; 2107.4,2364.5 2115.8,2364.5 ; 2107.4,2470.7 2160.5,2470.7 ; 2107.7,2639.6 2145.2,2639.6 ; 2108.3,2639.9 2204.3,2639.9 ; 2108.6,2450.6 2135.3,2450.6 ; 2108.6,2471 2161.4,2471 ; 2108.9,2450 2129.6,2450 ; 2108.9,2640.2 2204,2640.2 ; 2109.8,2471.3 2162,2471.3 ; 2109.8,2640.5 2203.4,2640.5 ; 2110.4,2640.8 2202.8,2640.8 ; 2111,2471.6 2162.9,2471.6 ; 2111,2641.1 2202.2,2641.1 ; 2111.3,2450.9 2137.4,2450.9 ; 2111.6,2641.4 2201.6,2641.4 ; 2112.2,2471.9 2163.5,2471.9 ; 2112.5,2641.7 2201,2641.7 ; 2113.1,2472.2 2164.4,2472.2 ; 2113.1,2642 2200.4,2642 ; 2113.7,2449.7 2125.1,2449.7 ; 2114,2642.3 2199.8,2642.3 ; 2114.3,2451.2 2139.2,2451.2 ; 2114.3,2472.5 2165,2472.5 ; 2114.6,2642.6 2199.2,2642.6 ; 2115.2,2312.9 2117.9,2312.9 ; 2115.2,2313.2 2117.9,2313.2 ; 2115.2,2313.5 2117.6,2313.5 ; 2115.2,2313.8 2117.6,2313.8 ; 2115.2,2314.1 2117.6,2314.1 ; 2115.2,2314.4 2117.6,2314.4 ; 2115.2,2314.7 2117.6,2314.7 ; 2115.2,2315 2117.6,2315 ; 2115.2,2315.3 2117.6,2315.3 ; 2115.2,2315.6 2117.6,2315.6 ; 2115.2,2315.9 2117.6,2315.9 ; 2115.2,2316.2 2117.9,2316.2 ; 2115.2,2316.5 2117.9,2316.5 ; 2115.2,2472.8 2165.6,2472.8 ; 2115.5,2311.7 2118.2,2311.7 ; 2115.5,2312 2117.9,2312 ; 2115.5,2312.3 2117.9,2312.3 ; 2115.5,2312.6 2117.9,2312.6 ; 2115.5,2316.8 2117.9,2316.8 ; 2115.5,2317.1 2117.9,2317.1 ; 2115.5,2317.4 2117.9,2317.4 ; 2115.5,2642.9 2198.3,2642.9 ; 2115.8,2311.1 2118.2,2311.1 ; 2115.8,2311.4 2118.2,2311.4 ; 2115.8,2317.7 2118.2,2317.7 ; 2115.8,2318 2118.2,2318 ; 2116.1,2310.5 2118.5,2310.5 ; 2116.1,2310.8 2118.5,2310.8 ; 2116.1,2318.3 2118.2,2318.3 ; 2116.1,2318.6 2118.5,2318.6 ; 2116.1,2473.1 2166.2,2473.1 ; 2116.1,2643.2 2197.7,2643.2 ; 2116.4,2310.2 2118.8,2310.2 ; 2116.4,2318.9 2118.8,2318.9 ; 2116.7,2309.9 2119.1,2309.9 ; 2116.7,2319.2 2118.8,2319.2 ; 2116.7,2451.5 2141,2451.5 ; 2117,2309.6 2119.1,2309.6 ; 2117,2319.5 2119.1,2319.5 ; 2117,2319.8 2119.4,2319.8 ; 2117,2643.5 2197.1,2643.5 ; 2117.3,2309.3 2119.7,2309.3 ; 2117.3,2320.1 2119.7,2320.1 ; 2117.3,2473.4 2166.8,2473.4 ; 2117.6,2309 2120,2309 ; 2117.9,2320.4 2120.3,2320.4 ; 2117.9,2643.8 2196.2,2643.8 ; 2118.2,2320.7 2121.5,2320.7 ; 2118.2,2473.7 2167.4,2473.7 ; 2118.5,2644.1 2195.6,2644.1 ; 2118.8,2321 2124.8,2321 ; 2119.1,2451.8 2142.8,2451.8 ; 2119.1,2474 2168,2474 ; 2119.4,2321.3 2124.2,2321.3 ; 2119.4,2644.4 2194.7,2644.4 ; 2119.7,2332.1 2128.1,2332.1 ; 2119.7,2332.4 2128.4,2332.4 ; 2119.7,2332.7 2128.4,2332.7 ; 2119.7,2333 2128.4,2333 ; 2119.7,2333.3 2128.4,2333.3 ; 2119.7,2333.6 2128.4,2333.6 ; 2119.7,2333.9 2128.1,2333.9 ; 2119.7,2373.5 2128.1,2373.5 ; 2119.7,2373.8 2128.4,2373.8 ; 2119.7,2374.1 2128.4,2374.1 ; 2119.7,2374.4 2128.4,2374.4 ; 2119.7,2374.7 2128.4,2374.7 ; 2119.7,2375 2128.4,2375 ; 2119.7,2375.3 2128.1,2375.3 ; 2120,2331.2 2127.8,2331.2 ; 2120,2331.5 2128.1,2331.5 ; 2120,2331.8 2128.1,2331.8 ; 2120,2334.2 2128.1,2334.2 ; 2120,2334.5 2128.1,2334.5 ; 2120,2334.8 2128.1,2334.8 ; 2120,2372.6 2128.1,2372.6 ; 2120,2372.9 2128.1,2372.9 ; 2120,2373.2 2128.1,2373.2 ; 2120,2375.6 2128.1,2375.6 ; 2120,2375.9 2128.1,2375.9 ; 2120,2376.2 2128.1,2376.2 ; 2120,2474.3 2168.6,2474.3 ; 2120.3,2321.6 2123.3,2321.6 ; 2120.3,2330.9 2127.8,2330.9 ; 2120.3,2335.1 2127.8,2335.1 ; 2120.3,2335.4 2127.8,2335.4 ; 2120.3,2372 2127.8,2372 ; 2120.3,2372.3 2127.8,2372.3 ; 2120.3,2376.5 2127.8,2376.5 ; 2120.3,2376.8 2127.5,2376.8 ; 2120.3,2644.7 2194.1,2644.7 ; 2120.6,2330.3 2127.2,2330.3 ; 2120.6,2330.6 2127.5,2330.6 ; 2120.6,2335.7 2127.5,2335.7 ; 2120.6,2371.7 2127.5,2371.7 ; 2120.6,2377.1 2127.5,2377.1 ; 2120.9,2330 2127.2,2330 ; 2120.9,2336 2127.2,2336 ; 2120.9,2371.4 2127.2,2371.4 ; 2120.9,2377.4 2127.2,2377.4 ; 2120.9,2474.6 2169.2,2474.6 ; 2121.2,2329.7 2126.6,2329.7 ; 2121.2,2336.3 2126.9,2336.3 ; 2121.2,2371.1 2126.9,2371.1 ; 2121.2,2377.7 2126.9,2377.7 ; 2121.2,2645 2193.2,2645 ; 2121.5,2336.6 2126.6,2336.6 ; 2121.5,2370.8 2126.6,2370.8 ; 2121.5,2378 2126.3,2378 ; 2121.5,2452.1 2144.3,2452.1 ; 2121.8,2329.4 2126.3,2329.4 ; 2121.8,2336.9 2126,2336.9 ; 2121.8,2474.9 2169.8,2474.9 ; 2122.1,2320.7 2125.4,2320.7 ; 2122.1,2370.5 2126,2370.5 ; 2122.1,2378.3 2126,2378.3 ; 2122.1,2645.3 2192.6,2645.3 ; 2122.4,2329.1 2125.7,2329.1 ; 2122.7,2337.2 2125.4,2337.2 ; 2122.7,2475.2 2170.4,2475.2 ; 2123,2370.2 2125.1,2370.2 ; 2123,2378.6 2124.8,2378.6 ; 2123,2645.6 2191.7,2645.6 ; 2123.3,2320.4 2125.7,2320.4 ; 2123.6,2309 2126,2309 ; 2123.6,2452.4 2145.5,2452.4 ; 2123.6,2475.5 2171,2475.5 ; 2123.9,2309.3 2126.3,2309.3 ; 2123.9,2320.1 2126,2320.1 ; 2123.9,2645.9 2190.8,2645.9 ; 2124.2,2309.6 2126.6,2309.6 ; 2124.2,2319.8 2126.3,2319.8 ; 2124.5,2309.9 2126.9,2309.9 ; 2124.5,2319.5 2126.6,2319.5 ; 2124.5,2475.8 2171.3,2475.8 ; 2124.8,2310.2 2126.9,2310.2 ; 2124.8,2318.9 2127.2,2318.9 ; 2124.8,2319.2 2126.9,2319.2 ; 2124.8,2646.2 2189.9,2646.2 ; 2125.1,2310.5 2127.2,2310.5 ; 2125.1,2310.8 2127.5,2310.8 ; 2125.1,2311.1 2127.5,2311.1 ; 2125.1,2318.3 2127.5,2318.3 ; 2125.1,2318.6 2127.2,2318.6 ; 2125.1,2476.1 2171.9,2476.1 ; 2125.4,2311.4 2127.8,2311.4 ; 2125.4,2311.7 2127.8,2311.7 ; 2125.4,2312 2127.8,2312 ; 2125.4,2317.4 2127.8,2317.4 ; 2125.4,2317.7 2127.8,2317.7 ; 2125.4,2318 2127.5,2318 ; 2125.7,2312.3 2128.1,2312.3 ; 2125.7,2312.6 2128.1,2312.6 ; 2125.7,2312.9 2128.1,2312.9 ; 2125.7,2313.2 2128.1,2313.2 ; 2125.7,2313.5 2128.4,2313.5 ; 2125.7,2313.8 2128.4,2313.8 ; 2125.7,2314.1 2128.4,2314.1 ; 2125.7,2314.4 2128.4,2314.4 ; 2125.7,2314.7 2128.4,2314.7 ; 2125.7,2315 2128.4,2315 ; 2125.7,2315.3 2128.4,2315.3 ; 2125.7,2315.6 2128.4,2315.6 ; 2125.7,2315.9 2128.4,2315.9 ; 2125.7,2316.2 2128.1,2316.2 ; 2125.7,2316.5 2128.1,2316.5 ; 2125.7,2316.8 2128.1,2316.8 ; 2125.7,2317.1 2128.1,2317.1 ; 2125.7,2452.7 2147,2452.7 ; 2125.7,2646.5 2189,2646.5 ; 2126,2476.4 2172.5,2476.4 ; 2126.9,2476.7 2172.8,2476.7 ; 2126.9,2646.8 2188.1,2646.8 ; 2127.5,2453 2148.2,2453 ; 2127.5,2477 2173.4,2477 ; 2127.8,2647.1 2186.9,2647.1 ; 2128.4,2477.3 2173.7,2477.3 ; 2129,2537.9 2129.3,2537.9 ; 2129,2538.2 2129.6,2538.2 ; 2129,2647.4 2186,2647.4 ; 2129.3,2477.6 2174.3,2477.6 ; 2129.3,2538.5 2129.9,2538.5 ; 2129.6,2453.3 2149.4,2453.3 ; 2129.6,2538.8 2130.5,2538.8 ; 2129.9,2477.9 2174.6,2477.9 ; 2130.2,2329.1 2146.7,2329.1 ; 2130.2,2329.4 2146.7,2329.4 ; 2130.2,2329.7 2146.7,2329.7 ; 2130.2,2330 2146.7,2330 ; 2130.2,2330.3 2146.7,2330.3 ; 2130.2,2330.6 2146.7,2330.6 ; 2130.2,2330.9 2146.7,2330.9 ; 2130.2,2331.2 2146.7,2331.2 ; 2130.2,2331.5 2146.7,2331.5 ; 2130.2,2331.8 2146.7,2331.8 ; 2130.2,2332.1 2146.7,2332.1 ; 2130.2,2332.4 2146.7,2332.4 ; 2130.2,2332.7 2146.7,2332.7 ; 2130.2,2333 2146.7,2333 ; 2130.2,2333.3 2146.7,2333.3 ; 2130.2,2333.6 2146.7,2333.6 ; 2130.2,2333.9 2146.7,2333.9 ; 2130.2,2334.2 2146.7,2334.2 ; 2130.2,2334.5 2146.7,2334.5 ; 2130.2,2334.8 2146.7,2334.8 ; 2130.2,2335.1 2146.7,2335.1 ; 2130.2,2335.4 2146.7,2335.4 ; 2130.2,2335.7 2146.7,2335.7 ; 2130.2,2336 2146.7,2336 ; 2130.2,2336.3 2146.7,2336.3 ; 2130.2,2336.6 2146.7,2336.6 ; 2130.2,2336.9 2146.7,2336.9 ; 2130.2,2337.2 2146.7,2337.2 ; 2130.2,2337.5 2138.6,2337.5 ; 2130.2,2337.8 2138.6,2337.8 ; 2130.2,2338.1 2138.6,2338.1 ; 2130.2,2338.4 2138.6,2338.4 ; 2130.2,2338.7 2138.6,2338.7 ; 2130.2,2339 2138.6,2339 ; 2130.2,2339.3 2138.6,2339.3 ; 2130.2,2339.6 2138.6,2339.6 ; 2130.2,2339.9 2138.6,2339.9 ; 2130.2,2340.2 2138.6,2340.2 ; 2130.2,2340.5 2138.6,2340.5 ; 2130.2,2340.8 2138.6,2340.8 ; 2130.2,2341.1 2138.6,2341.1 ; 2130.2,2341.4 2138.6,2341.4 ; 2130.2,2341.7 2138.6,2341.7 ; 2130.2,2342 2138.6,2342 ; 2130.2,2342.3 2138.6,2342.3 ; 2130.2,2342.6 2138.6,2342.6 ; 2130.2,2342.9 2138.6,2342.9 ; 2130.2,2343.2 2138.6,2343.2 ; 2130.2,2343.5 2138.6,2343.5 ; 2130.2,2343.8 2138.6,2343.8 ; 2130.2,2344.1 2138.6,2344.1 ; 2130.2,2344.4 2138.6,2344.4 ; 2130.2,2344.7 2138.6,2344.7 ; 2130.2,2345 2138.6,2345 ; 2130.2,2345.3 2138.6,2345.3 ; 2130.2,2345.6 2138.6,2345.6 ; 2130.2,2345.9 2138.6,2345.9 ; 2130.2,2346.2 2138.6,2346.2 ; 2130.2,2346.5 2138.6,2346.5 ; 2130.2,2346.8 2138.6,2346.8 ; 2130.2,2347.1 2138.6,2347.1 ; 2130.2,2347.4 2138.6,2347.4 ; 2130.2,2347.7 2138.6,2347.7 ; 2130.2,2348 2138.6,2348 ; 2130.2,2348.3 2138.6,2348.3 ; 2130.2,2348.6 2138.6,2348.6 ; 2130.2,2348.9 2138.6,2348.9 ; 2130.2,2349.2 2138.6,2349.2 ; 2130.2,2349.5 2138.6,2349.5 ; 2130.2,2349.8 2138.6,2349.8 ; 2130.2,2350.1 2138.6,2350.1 ; 2130.2,2350.4 2138.6,2350.4 ; 2130.2,2350.7 2138.6,2350.7 ; 2130.2,2351 2138.6,2351 ; 2130.2,2351.3 2138.6,2351.3 ; 2130.2,2351.6 2138.6,2351.6 ; 2130.2,2351.9 2138.6,2351.9 ; 2130.2,2352.2 2138.6,2352.2 ; 2130.2,2352.5 2138.6,2352.5 ; 2130.2,2352.8 2138.6,2352.8 ; 2130.2,2353.1 2138.6,2353.1 ; 2130.2,2353.4 2138.6,2353.4 ; 2130.2,2353.7 2138.6,2353.7 ; 2130.2,2354 2138.6,2354 ; 2130.2,2354.3 2138.6,2354.3 ; 2130.2,2354.6 2138.6,2354.6 ; 2130.2,2354.9 2138.6,2354.9 ; 2130.2,2355.2 2138.6,2355.2 ; 2130.2,2355.5 2138.6,2355.5 ; 2130.2,2355.8 2138.6,2355.8 ; 2130.2,2356.1 2138.6,2356.1 ; 2130.2,2356.4 2138.6,2356.4 ; 2130.2,2356.7 2138.6,2356.7 ; 2130.2,2357 2138.6,2357 ; 2130.2,2357.3 2138.6,2357.3 ; 2130.2,2357.6 2138.6,2357.6 ; 2130.2,2357.9 2138.6,2357.9 ; 2130.2,2358.2 2138.6,2358.2 ; 2130.2,2358.5 2138.6,2358.5 ; 2130.2,2358.8 2138.6,2358.8 ; 2130.2,2359.1 2138.6,2359.1 ; 2130.2,2359.4 2138.6,2359.4 ; 2130.2,2359.7 2138.6,2359.7 ; 2130.2,2360 2138.6,2360 ; 2130.2,2360.3 2138.6,2360.3 ; 2130.2,2360.6 2138.6,2360.6 ; 2130.2,2360.9 2138.6,2360.9 ; 2130.2,2361.2 2138.6,2361.2 ; 2130.2,2361.5 2138.6,2361.5 ; 2130.2,2361.8 2138.6,2361.8 ; 2130.2,2362.1 2138.6,2362.1 ; 2130.2,2362.4 2138.6,2362.4 ; 2130.2,2362.7 2138.6,2362.7 ; 2130.2,2363 2138.6,2363 ; 2130.2,2363.3 2138.6,2363.3 ; 2130.2,2363.6 2138.6,2363.6 ; 2130.2,2363.9 2138.6,2363.9 ; 2130.2,2364.2 2138.6,2364.2 ; 2130.2,2364.5 2138.6,2364.5 ; 2130.2,2364.8 2138.6,2364.8 ; 2130.2,2365.1 2138.6,2365.1 ; 2130.2,2365.4 2138.6,2365.4 ; 2130.2,2365.7 2138.6,2365.7 ; 2130.2,2366 2138.6,2366 ; 2130.2,2366.3 2138.6,2366.3 ; 2130.2,2366.6 2138.6,2366.6 ; 2130.2,2366.9 2138.6,2366.9 ; 2130.2,2367.2 2138.6,2367.2 ; 2130.2,2367.5 2138.6,2367.5 ; 2130.2,2367.8 2138.6,2367.8 ; 2130.2,2368.1 2138.6,2368.1 ; 2130.2,2368.4 2138.6,2368.4 ; 2130.2,2368.7 2138.6,2368.7 ; 2130.2,2369 2138.6,2369 ; 2130.2,2369.3 2138.6,2369.3 ; 2130.2,2369.6 2138.6,2369.6 ; 2130.2,2369.9 2138.6,2369.9 ; 2130.2,2370.2 2146.7,2370.2 ; 2130.2,2370.5 2146.7,2370.5 ; 2130.2,2370.8 2146.7,2370.8 ; 2130.2,2371.1 2146.7,2371.1 ; 2130.2,2371.4 2146.7,2371.4 ; 2130.2,2371.7 2146.7,2371.7 ; 2130.2,2372 2146.7,2372 ; 2130.2,2372.3 2146.7,2372.3 ; 2130.2,2372.6 2146.7,2372.6 ; 2130.2,2372.9 2146.7,2372.9 ; 2130.2,2373.2 2146.7,2373.2 ; 2130.2,2373.5 2146.7,2373.5 ; 2130.2,2373.8 2146.7,2373.8 ; 2130.2,2374.1 2146.7,2374.1 ; 2130.2,2374.4 2146.7,2374.4 ; 2130.2,2374.7 2146.7,2374.7 ; 2130.2,2375 2146.7,2375 ; 2130.2,2375.3 2146.7,2375.3 ; 2130.2,2375.6 2146.7,2375.6 ; 2130.2,2375.9 2146.7,2375.9 ; 2130.2,2376.2 2146.7,2376.2 ; 2130.2,2376.5 2146.7,2376.5 ; 2130.2,2376.8 2146.7,2376.8 ; 2130.2,2377.1 2146.7,2377.1 ; 2130.2,2377.4 2146.7,2377.4 ; 2130.2,2377.7 2146.7,2377.7 ; 2130.2,2378 2146.7,2378 ; 2130.2,2378.3 2146.7,2378.3 ; 2130.2,2378.6 2146.7,2378.6 ; 2130.2,2539.1 2130.8,2539.1 ; 2130.2,2647.7 2184.8,2647.7 ; 2130.5,2539.4 2131.1,2539.4 ; 2130.8,2478.2 2175.2,2478.2 ; 2130.8,2539.7 2131.4,2539.7 ; 2131.1,2453.6 2150.6,2453.6 ; 2131.1,2540 2132,2540 ; 2131.4,2478.5 2175.5,2478.5 ; 2131.4,2540.3 2132.3,2540.3 ; 2131.4,2648 2183.9,2648 ; 2131.7,2540.6 2132.6,2540.6 ; 2132,2540.9 2132.9,2540.9 ; 2132.3,2478.8 2175.8,2478.8 ; 2132.6,2541.2 2133.2,2541.2 ; 2132.6,2648.3 2182.7,2648.3 ; 2132.9,2453.9 2151.8,2453.9 ; 2132.9,2479.1 2176.4,2479.1 ; 2132.9,2541.5 2133.8,2541.5 ; 2133.2,2541.8 2134.1,2541.8 ; 2133.5,2479.4 2176.7,2479.4 ; 2133.5,2542.1 2134.4,2542.1 ; 2133.8,2542.4 2134.7,2542.4 ; 2133.8,2648.6 2181.5,2648.6 ; 2134.1,2542.7 2135.3,2542.7 ; 2134.4,2454.2 2152.7,2454.2 ; 2134.4,2479.7 2177,2479.7 ; 2134.4,2543 2135.6,2543 ; 2135,2480 2177.3,2480 ; 2135,2543.3 2135.9,2543.3 ; 2135,2648.9 2180,2648.9 ; 2135.3,2543.6 2136.2,2543.6 ; 2135.6,2480.3 2177.9,2480.3 ; 2135.6,2543.9 2136.5,2543.9 ; 2135.9,2454.5 2153.9,2454.5 ; 2135.9,2544.2 2137.1,2544.2 ; 2136.2,2544.5 2137.4,2544.5 ; 2136.5,2321 2140.7,2321 ; 2136.5,2321.3 2140.4,2321.3 ; 2136.5,2480.6 2178.2,2480.6 ; 2136.5,2544.8 2137.7,2544.8 ; 2136.5,2649.2 2178.5,2649.2 ; 2136.8,2545.1 2138,2545.1 ; 2137.1,2320.7 2141,2320.7 ; 2137.1,2480.9 2178.5,2480.9 ; 2137.1,2545.4 2138.6,2545.4 ; 2137.4,2454.8 2154.8,2454.8 ; 2137.7,2481.2 2178.8,2481.2 ; 2137.7,2545.7 2138.9,2545.7 ; 2137.7,2649.5 2177,2649.5 ; 2138,2320.4 2141.3,2320.4 ; 2138,2517.8 2142.8,2517.8 ; 2138,2546 2139.2,2546 ; 2138.3,2320.1 2141.6,2320.1 ; 2138.3,2481.5 2179.1,2481.5 ; 2138.3,2517.5 2147.3,2517.5 ; 2138.3,2546.3 2139.5,2546.3 ; 2138.6,2455.1 2156,2455.1 ; 2138.6,2517.2 2150.3,2517.2 ; 2138.6,2546.6 2140.1,2546.6 ; 2138.9,2309 2140.4,2309 ; 2138.9,2319.8 2141.6,2319.8 ; 2138.9,2481.8 2179.4,2481.8 ; 2138.9,2516.9 2153,2516.9 ; 2138.9,2546.9 2140.4,2546.9 ; 2139.2,2309.3 2140.4,2309.3 ; 2139.2,2309.6 2140.4,2309.6 ; 2139.2,2309.9 2140.4,2309.9 ; 2139.2,2310.2 2140.4,2310.2 ; 2139.2,2310.5 2140.4,2310.5 ; 2139.2,2310.8 2140.4,2310.8 ; 2139.2,2311.1 2140.4,2311.1 ; 2139.2,2311.4 2140.4,2311.4 ; 2139.2,2311.7 2140.4,2311.7 ; 2139.2,2312 2140.4,2312 ; 2139.2,2312.3 2140.4,2312.3 ; 2139.2,2312.6 2140.4,2312.6 ; 2139.2,2312.9 2140.4,2312.9 ; 2139.2,2313.2 2140.4,2313.2 ; 2139.2,2313.5 2140.4,2313.5 ; 2139.2,2313.8 2140.4,2313.8 ; 2139.2,2314.1 2140.4,2314.1 ; 2139.2,2314.4 2140.4,2314.4 ; 2139.2,2314.7 2140.4,2314.7 ; 2139.2,2315 2140.4,2315 ; 2139.2,2315.3 2140.4,2315.3 ; 2139.2,2315.6 2140.4,2315.6 ; 2139.2,2315.9 2140.4,2315.9 ; 2139.2,2316.2 2140.4,2316.2 ; 2139.2,2316.5 2140.4,2316.5 ; 2139.2,2316.8 2140.4,2316.8 ; 2139.2,2317.1 2140.4,2317.1 ; 2139.2,2317.4 2140.4,2317.4 ; 2139.2,2317.7 2143.4,2317.7 ; 2139.2,2318 2143.1,2318 ; 2139.2,2318.3 2142.8,2318.3 ; 2139.2,2318.6 2142.8,2318.6 ; 2139.2,2318.9 2142.5,2318.9 ; 2139.2,2319.2 2142.2,2319.2 ; 2139.2,2319.5 2141.9,2319.5 ; 2139.2,2547.2 2140.7,2547.2 ; 2139.5,2482.1 2179.7,2482.1 ; 2139.5,2516.6 2155.1,2516.6 ; 2139.5,2547.5 2141,2547.5 ; 2139.5,2649.8 2175.5,2649.8 ; 2140.1,2455.4 2156.9,2455.4 ; 2140.1,2482.4 2180,2482.4 ; 2140.1,2516.3 2156.9,2516.3 ; 2140.1,2547.8 2141.3,2547.8 ; 2140.4,2548.1 2141.9,2548.1 ; 2140.7,2317.4 2143.7,2317.4 ; 2140.7,2482.7 2180.3,2482.7 ; 2140.7,2516 2158.7,2516 ; 2140.7,2548.4 2142.2,2548.4 ; 2141,2317.1 2144,2317.1 ; 2141,2548.7 2142.5,2548.7 ; 2141.3,2316.8 2144,2316.8 ; 2141.3,2455.7 2157.8,2455.7 ; 2141.3,2483 2180.6,2483 ; 2141.3,2515.7 2160.2,2515.7 ; 2141.3,2549 2142.8,2549 ; 2141.3,2650.1 2173.7,2650.1 ; 2141.6,2316.2 2144.6,2316.2 ; 2141.6,2316.5 2144.3,2316.5 ; 2141.6,2549.3 2143.4,2549.3 ; 2141.9,2315.9 2144.9,2315.9 ; 2141.9,2483.3 2180.6,2483.3 ; 2141.9,2515.4 2161.7,2515.4 ; 2141.9,2549.6 2143.7,2549.6 ; 2142.2,2315.6 2145.2,2315.6 ; 2142.5,2315.3 2145.2,2315.3 ; 2142.5,2456 2158.7,2456 ; 2142.5,2483.6 2180.9,2483.6 ; 2142.5,2515.1 2162.9,2515.1 ; 2142.5,2549.9 2144,2549.9 ; 2142.8,2314.7 2145.8,2314.7 ; 2142.8,2315 2145.5,2315 ; 2142.8,2550.2 2144.3,2550.2 ; 2143.1,2314.4 2146.1,2314.4 ; 2143.1,2483.9 2181.2,2483.9 ; 2143.1,2550.5 2144.6,2550.5 ; 2143.1,2650.4 2171.6,2650.4 ; 2143.4,2314.1 2146.4,2314.1 ; 2143.4,2514.8 2164.1,2514.8 ; 2143.4,2550.8 2145.2,2550.8 ; 2143.7,2313.8 2146.4,2313.8 ; 2143.7,2456.3 2159.6,2456.3 ; 2143.7,2484.2 2181.5,2484.2 ; 2143.7,2551.1 2145.5,2551.1 ; 2144,2313.2 2147,2313.2 ; 2144,2313.5 2146.7,2313.5 ; 2144,2484.5 2181.8,2484.5 ; 2144,2514.5 2165.3,2514.5 ; 2144,2551.4 2145.8,2551.4 ; 2144.3,2312.9 2147.3,2312.9 ; 2144.3,2551.7 2146.1,2551.7 ; 2144.6,2312.6 2147.6,2312.6 ; 2144.6,2456.6 2160.5,2456.6 ; 2144.6,2484.8 2181.8,2484.8 ; 2144.9,2312.3 2147.6,2312.3 ; 2144.9,2514.2 2166.2,2514.2 ; 2144.9,2552 2146.7,2552 ; 2145.2,2312 2147.9,2312 ; 2145.2,2485.1 2182.1,2485.1 ; 2145.2,2552.3 2147,2552.3 ; 2145.5,2311.4 2149.4,2311.4 ; 2145.5,2311.7 2149.4,2311.7 ; 2145.5,2513.9 2167.4,2513.9 ; 2145.5,2552.6 2147.3,2552.6 ; 2145.5,2650.7 2169.2,2650.7 ; 2145.8,2311.1 2149.4,2311.1 ; 2145.8,2456.9 2161.1,2456.9 ; 2145.8,2485.4 2182.4,2485.4 ; 2145.8,2552.9 2147.6,2552.9 ; 2146.1,2310.8 2149.4,2310.8 ; 2146.1,2485.7 2182.4,2485.7 ; 2146.1,2513.6 2168.3,2513.6 ; 2146.1,2553.2 2148.2,2553.2 ; 2146.4,2310.5 2149.4,2310.5 ; 2146.4,2321 2151.2,2321 ; 2146.4,2321.3 2151.2,2321.3 ; 2146.4,2553.5 2148.5,2553.5 ; 2146.7,2309.9 2149.4,2309.9 ; 2146.7,2310.2 2149.4,2310.2 ; 2146.7,2457.2 2162,2457.2 ; 2146.7,2486 2182.7,2486 ; 2146.7,2553.8 2148.8,2553.8 ; 2147,2309.6 2149.4,2309.6 ; 2147,2486.3 2182.7,2486.3 ; 2147,2513.3 2169.2,2513.3 ; 2147.3,2309.3 2149.4,2309.3 ; 2147.3,2320.7 2150,2320.7 ; 2147.3,2554.1 2149.1,2554.1 ; 2147.6,2309 2149.4,2309 ; 2147.6,2486.6 2183,2486.6 ; 2147.6,2513 2169.8,2513 ; 2147.6,2554.4 2149.4,2554.4 ; 2147.9,2320.1 2149.4,2320.1 ; 2147.9,2320.4 2149.7,2320.4 ; 2147.9,2457.5 2162.9,2457.5 ; 2147.9,2554.7 2150,2554.7 ; 2148.2,2312 2149.4,2312 ; 2148.2,2312.3 2149.4,2312.3 ; 2148.2,2312.6 2149.4,2312.6 ; 2148.2,2312.9 2149.4,2312.9 ; 2148.2,2313.2 2149.4,2313.2 ; 2148.2,2313.5 2149.4,2313.5 ; 2148.2,2313.8 2149.4,2313.8 ; 2148.2,2314.1 2149.4,2314.1 ; 2148.2,2314.4 2149.4,2314.4 ; 2148.2,2314.7 2149.4,2314.7 ; 2148.2,2315 2149.4,2315 ; 2148.2,2315.3 2149.4,2315.3 ; 2148.2,2315.6 2149.4,2315.6 ; 2148.2,2315.9 2149.4,2315.9 ; 2148.2,2316.2 2149.4,2316.2 ; 2148.2,2316.5 2149.4,2316.5 ; 2148.2,2316.8 2149.4,2316.8 ; 2148.2,2317.1 2149.4,2317.1 ; 2148.2,2317.4 2149.4,2317.4 ; 2148.2,2317.7 2149.4,2317.7 ; 2148.2,2318 2149.4,2318 ; 2148.2,2318.3 2149.4,2318.3 ; 2148.2,2318.6 2149.4,2318.6 ; 2148.2,2318.9 2149.4,2318.9 ; 2148.2,2319.2 2149.4,2319.2 ; 2148.2,2319.5 2149.4,2319.5 ; 2148.2,2319.8 2149.4,2319.8 ; 2148.2,2486.9 2183,2486.9 ; 2148.2,2512.7 2170.7,2512.7 ; 2148.2,2555 2150.3,2555 ; 2148.5,2487.2 2183.3,2487.2 ; 2148.5,2555.3 2150.6,2555.3 ; 2148.5,2651 2165.9,2651 ; 2148.8,2457.8 2163.5,2457.8 ; 2148.8,2512.4 2171.6,2512.4 ; 2148.8,2555.6 2150.9,2555.6 ; 2149.1,2487.5 2183.3,2487.5 ; 2149.1,2555.9 2151.5,2555.9 ; 2149.4,2487.8 2183.6,2487.8 ; 2149.4,2512.1 2172.2,2512.1 ; 2149.7,2458.1 2164.4,2458.1 ; 2149.7,2488.1 2183.6,2488.1 ; 2149.7,2511.8 2172.8,2511.8 ; 2149.7,2556.2 2151.8,2556.2 ; 2150,2556.5 2152.1,2556.5 ; 2150.3,2488.4 2183.9,2488.4 ; 2150.3,2511.5 2173.4,2511.5 ; 2150.3,2556.8 2152.4,2556.8 ; 2150.6,2352.5 2159,2352.5 ; 2150.6,2352.8 2159,2352.8 ; 2150.6,2353.1 2159,2353.1 ; 2150.6,2353.4 2159,2353.4 ; 2150.6,2353.7 2159,2353.7 ; 2150.6,2354 2159,2354 ; 2150.6,2354.3 2159,2354.3 ; 2150.6,2354.6 2159,2354.6 ; 2150.6,2354.9 2159,2354.9 ; 2150.6,2458.4 2165.3,2458.4 ; 2150.6,2488.7 2183.9,2488.7 ; 2150.6,2511.2 2174,2511.2 ; 2150.6,2557.1 2152.7,2557.1 ; 2150.9,2351.9 2158.7,2351.9 ; 2150.9,2352.2 2159,2352.2 ; 2150.9,2355.2 2159,2355.2 ; 2150.9,2355.5 2158.7,2355.5 ; 2150.9,2489 2184.2,2489 ; 2150.9,2557.4 2153.3,2557.4 ; 2151.2,2351.3 2158.4,2351.3 ; 2151.2,2351.6 2158.7,2351.6 ; 2151.2,2355.8 2158.7,2355.8 ; 2151.2,2356.1 2158.4,2356.1 ; 2151.2,2510.9 2174.6,2510.9 ; 2151.2,2557.7 2153.6,2557.7 ; 2151.5,2351 2158.1,2351 ; 2151.5,2356.4 2158.1,2356.4 ; 2151.5,2458.7 2165.9,2458.7 ; 2151.5,2489.3 2184.2,2489.3 ; 2151.5,2510.6 2175.2,2510.6 ; 2151.5,2558 2153.9,2558 ; 2151.8,2350.7 2158.1,2350.7 ; 2151.8,2356.7 2158.1,2356.7 ; 2151.8,2489.6 2184.2,2489.6 ; 2151.8,2510.3 2175.8,2510.3 ; 2151.8,2558.3 2154.2,2558.3 ; 2152.1,2350.4 2157.5,2350.4 ; 2152.1,2357 2157.8,2357 ; 2152.1,2489.9 2184.5,2489.9 ; 2152.4,2350.1 2157.2,2350.1 ; 2152.4,2357.3 2157.2,2357.3 ; 2152.4,2459 2166.8,2459 ; 2152.4,2490.2 2184.5,2490.2 ; 2152.4,2510 2176.4,2510 ; 2152.4,2558.6 2154.8,2558.6 ; 2152.7,2342 2161.1,2342 ; 2152.7,2342.3 2161.1,2342.3 ; 2152.7,2342.6 2161.1,2342.6 ; 2152.7,2342.9 2161.1,2342.9 ; 2152.7,2343.2 2161.1,2343.2 ; 2152.7,2343.5 2161.1,2343.5 ; 2152.7,2343.8 2161.1,2343.8 ; 2152.7,2344.1 2161.1,2344.1 ; 2152.7,2344.4 2161.1,2344.4 ; 2152.7,2344.7 2161.1,2344.7 ; 2152.7,2362.7 2161.1,2362.7 ; 2152.7,2363 2161.1,2363 ; 2152.7,2363.3 2161.1,2363.3 ; 2152.7,2363.6 2161.1,2363.6 ; 2152.7,2363.9 2161.1,2363.9 ; 2152.7,2364.2 2161.1,2364.2 ; 2152.7,2364.5 2161.1,2364.5 ; 2152.7,2364.8 2161.1,2364.8 ; 2152.7,2365.1 2161.1,2365.1 ; 2152.7,2365.4 2161.1,2365.4 ; 2152.7,2490.5 2184.5,2490.5 ; 2152.7,2509.7 2176.7,2509.7 ; 2152.7,2558.9 2155.1,2558.9 ; 2153,2341.4 2160.8,2341.4 ; 2153,2341.7 2160.8,2341.7 ; 2153,2345 2160.8,2345 ; 2153,2345.3 2160.8,2345.3 ; 2153,2349.8 2156.6,2349.8 ; 2153,2357.6 2156.9,2357.6 ; 2153,2362.1 2160.8,2362.1 ; 2153,2362.4 2160.8,2362.4 ; 2153,2365.7 2160.8,2365.7 ; 2153,2366 2160.8,2366 ; 2153,2509.4 2177.3,2509.4 ; 2153,2559.2 2155.4,2559.2 ; 2153.3,2340.8 2160.5,2340.8 ; 2153.3,2341.1 2160.5,2341.1 ; 2153.3,2345.6 2160.5,2345.6 ; 2153.3,2345.9 2160.5,2345.9 ; 2153.3,2361.5 2160.5,2361.5 ; 2153.3,2361.8 2160.5,2361.8 ; 2153.3,2366.3 2160.5,2366.3 ; 2153.3,2366.6 2160.5,2366.6 ; 2153.3,2459.3 2167.4,2459.3 ; 2153.3,2490.8 2184.8,2490.8 ; 2153.3,2509.1 2177.6,2509.1 ; 2153.3,2559.5 2155.7,2559.5 ; 2153.6,2340.5 2160.2,2340.5 ; 2153.6,2346.2 2160.2,2346.2 ; 2153.6,2361.2 2160.2,2361.2 ; 2153.6,2366.9 2160.2,2366.9 ; 2153.6,2491.1 2184.8,2491.1 ; 2153.6,2559.8 2156.3,2559.8 ; 2153.9,2340.2 2159.9,2340.2 ; 2153.9,2346.5 2159.9,2346.5 ; 2153.9,2349.5 2155.7,2349.5 ; 2153.9,2357.9 2156,2357.9 ; 2153.9,2360.9 2159.9,2360.9 ; 2153.9,2367.2 2159.9,2367.2 ; 2153.9,2491.4 2184.8,2491.4 ; 2153.9,2508.8 2178.2,2508.8 ; 2153.9,2560.1 2156.6,2560.1 ; 2153.9,2651.3 2160.8,2651.3 ; 2154.2,2346.8 2159.6,2346.8 ; 2154.2,2360.6 2159.6,2360.6 ; 2154.2,2367.5 2159.6,2367.5 ; 2154.2,2459.6 2168,2459.6 ; 2154.2,2491.7 2185.1,2491.7 ; 2154.2,2508.5 2178.5,2508.5 ; 2154.2,2560.4 2156.9,2560.4 ; 2154.5,2339.9 2159.6,2339.9 ; 2154.5,2492 2185.1,2492 ; 2154.5,2508.2 2179.1,2508.2 ; 2154.8,2339.6 2159,2339.6 ; 2154.8,2347.1 2159.3,2347.1 ; 2154.8,2360.3 2159,2360.3 ; 2154.8,2367.8 2159,2367.8 ; 2154.8,2459.9 2168.9,2459.9 ; 2154.8,2492.3 2185.1,2492.3 ; 2154.8,2507.9 2179.4,2507.9 ; 2154.8,2560.7 2157.2,2560.7 ; 2155.1,2492.6 2185.1,2492.6 ; 2155.1,2492.9 2185.4,2492.9 ; 2155.1,2507.6 2179.7,2507.6 ; 2155.1,2561 2157.5,2561 ; 2155.4,2339.3 2158.4,2339.3 ; 2155.4,2347.4 2158.4,2347.4 ; 2155.4,2360 2158.4,2360 ; 2155.4,2368.1 2158.4,2368.1 ; 2155.4,2493.2 2185.4,2493.2 ; 2155.4,2507.3 2180,2507.3 ; 2155.4,2561.3 2158.1,2561.3 ; 2155.7,2460.2 2169.5,2460.2 ; 2155.7,2493.5 2185.4,2493.5 ; 2155.7,2506.7 2180.9,2506.7 ; 2155.7,2507 2180.3,2507 ; 2155.7,2561.6 2158.4,2561.6 ; 2156,2493.8 2185.4,2493.8 ; 2156,2506.4 2181.2,2506.4 ; 2156,2561.9 2158.7,2561.9 ; 2156.3,2494.1 2185.4,2494.1 ; 2156.3,2494.4 2185.4,2494.4 ; 2156.3,2506.1 2181.5,2506.1 ; 2156.3,2562.2 2159,2562.2 ; 2156.6,2460.5 2170.1,2460.5 ; 2156.6,2494.7 2185.4,2494.7 ; 2156.6,2505.5 2181.8,2505.5 ; 2156.6,2505.8 2181.5,2505.8 ; 2156.6,2562.5 2159.6,2562.5 ; 2156.9,2495 2185.4,2495 ; 2156.9,2495.3 2185.7,2495.3 ; 2156.9,2505.2 2182.1,2505.2 ; 2156.9,2639.6 2204.9,2639.6 ; 2157.2,2460.8 2170.7,2460.8 ; 2157.2,2495.6 2185.7,2495.6 ; 2157.2,2495.9 2185.7,2495.9 ; 2157.2,2504.6 2182.7,2504.6 ; 2157.2,2504.9 2182.4,2504.9 ; 2157.2,2562.8 2159.9,2562.8 ; 2157.5,2496.2 2185.7,2496.2 ; 2157.5,2496.5 2185.7,2496.5 ; 2157.5,2504 2183,2504 ; 2157.5,2504.3 2183,2504.3 ; 2157.5,2563.1 2160.2,2563.1 ; 2157.8,2496.8 2185.7,2496.8 ; 2157.8,2497.1 2185.4,2497.1 ; 2157.8,2503.4 2183.6,2503.4 ; 2157.8,2503.7 2183.3,2503.7 ; 2157.8,2563.4 2160.5,2563.4 ; 2158.1,2461.1 2171.3,2461.1 ; 2158.1,2497.4 2185.4,2497.4 ; 2158.1,2497.7 2185.4,2497.7 ; 2158.1,2498 2185.4,2498 ; 2158.1,2498.3 2185.4,2498.3 ; 2158.1,2502.2 2184.2,2502.2 ; 2158.1,2502.5 2183.9,2502.5 ; 2158.1,2502.8 2183.9,2502.8 ; 2158.1,2503.1 2183.6,2503.1 ; 2158.1,2563.7 2160.8,2563.7 ; 2158.4,2498.6 2185.4,2498.6 ; 2158.4,2498.9 2185.4,2498.9 ; 2158.4,2499.2 2185.1,2499.2 ; 2158.4,2499.5 2185.1,2499.5 ; 2158.4,2499.8 2185.1,2499.8 ; 2158.4,2500.1 2185.1,2500.1 ; 2158.4,2500.4 2184.8,2500.4 ; 2158.4,2500.7 2184.8,2500.7 ; 2158.4,2501 2184.8,2501 ; 2158.4,2501.3 2184.5,2501.3 ; 2158.4,2501.6 2184.5,2501.6 ; 2158.4,2501.9 2184.2,2501.9 ; 2158.4,2564 2161.4,2564 ; 2158.7,2461.4 2172.2,2461.4 ; 2158.7,2564.3 2161.7,2564.3 ; 2159,2564.6 2162,2564.6 ; 2159.3,2461.7 2172.8,2461.7 ; 2159.6,2321 2165.6,2321 ; 2159.6,2321.3 2165.6,2321.3 ; 2159.6,2564.9 2162.3,2564.9 ; 2159.9,2565.2 2162.9,2565.2 ; 2160.2,2462 2173.4,2462 ; 2160.2,2565.5 2163.2,2565.5 ; 2160.2,2639.3 2205.5,2639.3 ; 2160.5,2565.8 2163.5,2565.8 ; 2160.8,2320.7 2164.7,2320.7 ; 2160.8,2334.5 2169.5,2334.5 ; 2160.8,2334.8 2169.5,2334.8 ; 2160.8,2335.1 2169.5,2335.1 ; 2160.8,2335.4 2169.5,2335.4 ; 2160.8,2335.7 2169.5,2335.7 ; 2160.8,2371.7 2169.5,2371.7 ; 2160.8,2372 2169.5,2372 ; 2160.8,2372.3 2169.5,2372.3 ; 2160.8,2372.6 2169.5,2372.6 ; 2160.8,2372.9 2169.5,2372.9 ; 2160.8,2462.3 2174,2462.3 ; 2160.8,2566.1 2163.8,2566.1 ; 2161.1,2320.4 2164.1,2320.4 ; 2161.1,2333.3 2169.2,2333.3 ; 2161.1,2333.6 2169.2,2333.6 ; 2161.1,2333.9 2169.2,2333.9 ; 2161.1,2334.2 2169.5,2334.2 ; 2161.1,2336 2169.5,2336 ; 2161.1,2336.3 2169.2,2336.3 ; 2161.1,2336.6 2169.2,2336.6 ; 2161.1,2336.9 2169.2,2336.9 ; 2161.1,2370.5 2169.2,2370.5 ; 2161.1,2370.8 2169.2,2370.8 ; 2161.1,2371.1 2169.2,2371.1 ; 2161.1,2371.4 2169.5,2371.4 ; 2161.1,2373.2 2169.5,2373.2 ; 2161.1,2373.5 2169.2,2373.5 ; 2161.1,2373.8 2169.2,2373.8 ; 2161.1,2374.1 2169.2,2374.1 ; 2161.1,2566.4 2164.4,2566.4 ; 2161.4,2309 2163.8,2309 ; 2161.4,2309.3 2163.8,2309.3 ; 2161.4,2309.6 2163.8,2309.6 ; 2161.4,2309.9 2163.8,2309.9 ; 2161.4,2310.2 2163.8,2310.2 ; 2161.4,2319.2 2163.8,2319.2 ; 2161.4,2319.5 2163.8,2319.5 ; 2161.4,2319.8 2163.8,2319.8